# EAGLE board _main (EAGLE 8.0.2)
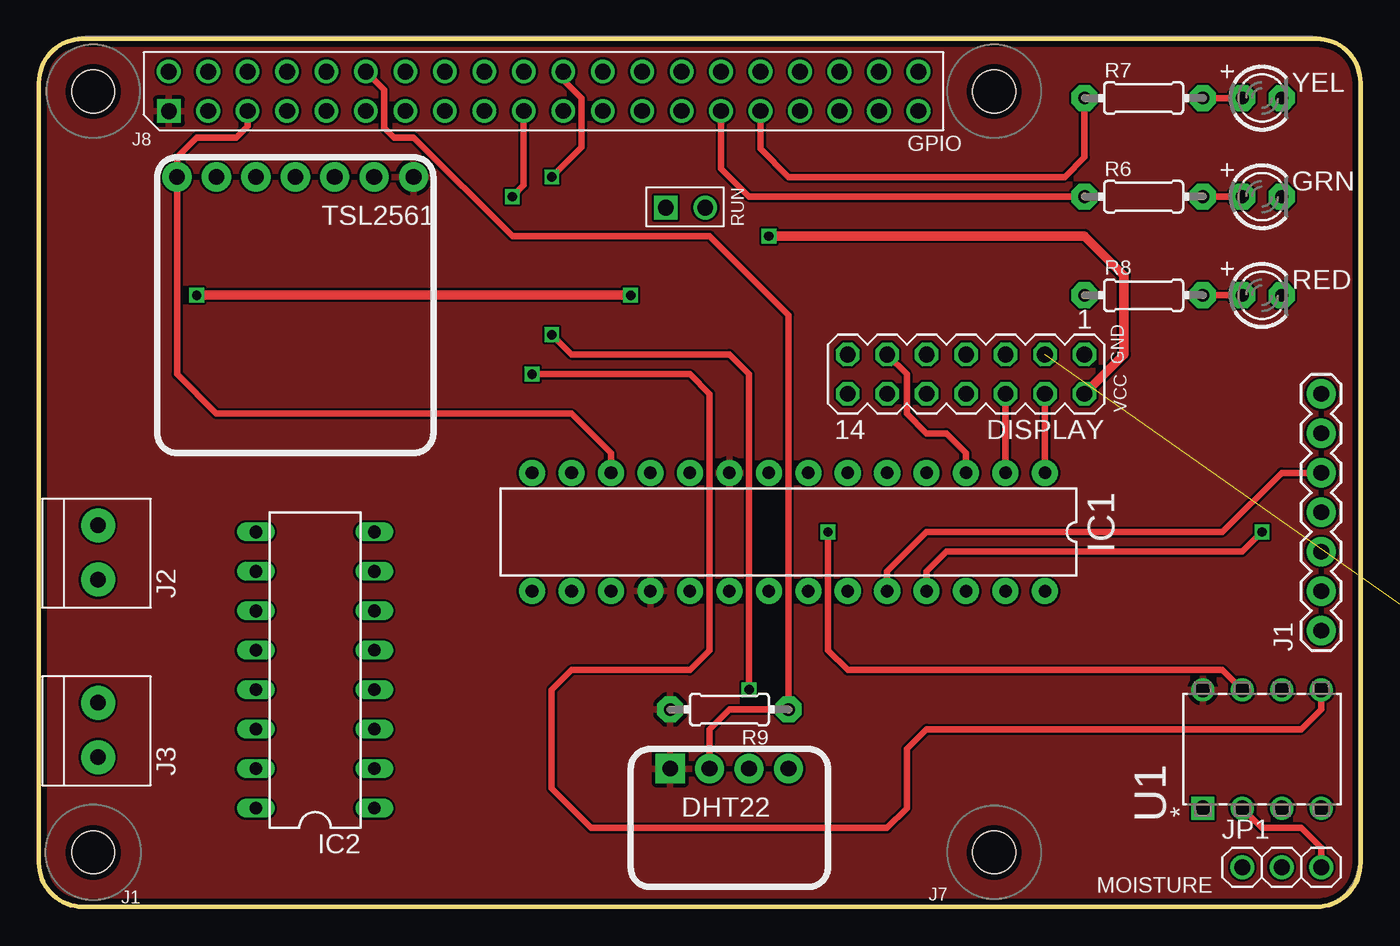
[diagram p0: board, top side]
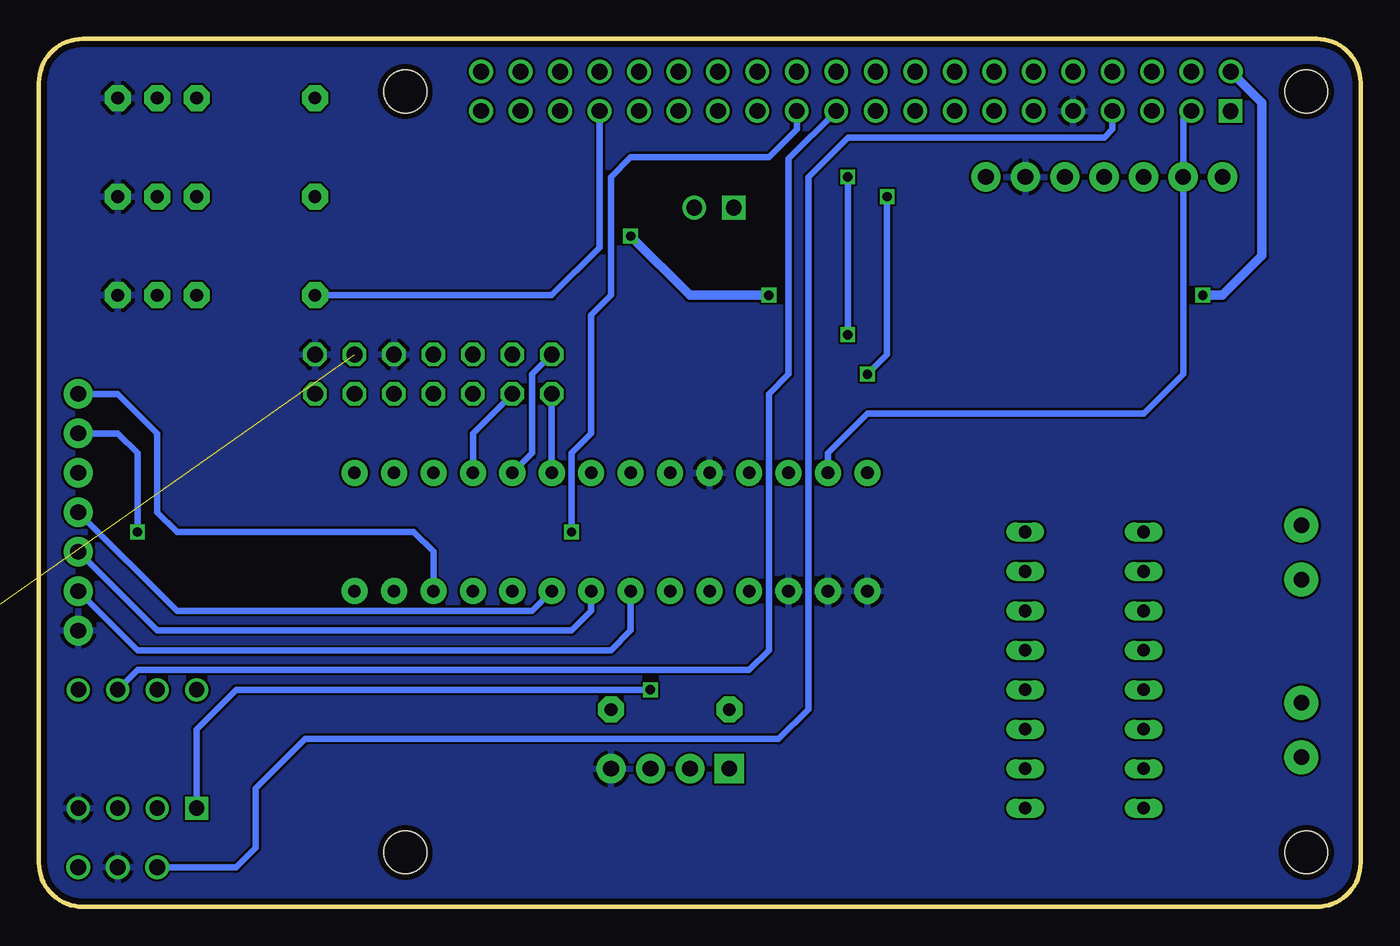
[diagram p1: board, bottom side, seen from below]

Size 85.09 x 55.88 mm. Coordinates in mm from the lower left corner, seen from the top.
Copper layers (1*16): Top 0.0356mm / dielectric 1.5011mm / Bottom 0.0356mm
Design rules "MakerWorks": minimum track width 6mil, minimum drill 13mil, track to track 6mil, track to pad 6mil, pad to pad 6mil, via to via 6mil, smd to smd 6mil, copper to edge 15mil, drill to drill 6mil, minimum pad ring 7mil, minimum via ring 7mil, stop-mask expansion 3mil, vias tented up to drill 0mil, thermal gap 10mil

## Footprints (pad centres in the part's own frame; a part is rotated, then mirrored left to right if it is on the bottom)
1X04_NO_SILK = drill 1.016 pad 1.88 square: 1 0,0 | drill 1.016 pad 1.88: 2 2.54,0; 3 5.08,0; 4 7.62,0
MA07-2 = drill 1.016 octagon: 1 -7.62,-1.27; 2 -7.62,1.27; 3 -5.08,-1.27; 4 -5.08,1.27; 5 -2.54,-1.27; 6 -2.54,1.27; 7 0,-1.27; 8 0,1.27; 9 2.54,-1.27; 10 2.54,1.27; 11 5.08,-1.27; 12 5.08,1.27; 13 7.62,-1.27; 14 7.62,1.27
LED3MM = drill 0.813 pad 1.676 octagon: A -1.27,0; K 1.27,0
DIL28-3-ROUND = drill 0.813 pad 1.676: 1 -16.51,-3.81; 2 -13.97,-3.81; 3 -11.43,-3.81; 4 -8.89,-3.81; 5 -6.35,-3.81; 6 -3.81,-3.81; 7 -1.27,-3.81; 8 1.27,-3.81; 9 3.81,-3.81; 10 6.35,-3.81; 11 8.89,-3.81; 12 11.43,-3.81; 13 13.97,-3.81; 14 16.51,-3.81; 15 16.51,3.81; 16 13.97,3.81; 17 11.43,3.81; 18 8.89,3.81; 19 6.35,3.81; 20 3.81,3.81; 21 1.27,3.81; 22 -1.27,3.81; 23 -3.81,3.81; 24 -6.35,3.81; 25 -8.89,3.81; 26 -11.43,3.81; 27 -13.97,3.81; 28 -16.51,3.81
DIL16 = drill 0.813 long: 1 -8.89,-3.81; 2 -6.35,-3.81; 3 -3.81,-3.81; 4 -1.27,-3.81; 5 1.27,-3.81; 6 3.81,-3.81; 7 6.35,-3.81; 8 8.89,-3.81; 9 8.89,3.81; 10 6.35,3.81; 11 3.81,3.81; 12 1.27,3.81; 13 -1.27,3.81; 14 -3.81,3.81; 15 -6.35,3.81; 16 -8.89,3.81
1X07 = drill 1.016 pad 1.88: 1 0,0; 2 2.54,0; 3 5.08,0; 4 7.62,0; 5 10.16,0; 6 12.7,0; 7 15.24,0
1X2-3.5MM = drill 1 pad 2.184: 1 1.8,0; 2 -1.7,0
1X03 = drill 1.016: 1 -2.54,0; 2 0,0; 3 2.54,0
RPI2 = drill 1.016 square: P$1 8.37,51.23; P$41 40.36,45.01 | drill 1.016: P$2 8.357,53.772; P$3 10.897,51.232; P$4 10.897,53.772; P$5 13.437,51.232; P$6 13.437,53.772; P$7 15.977,51.232; P$8 15.977,53.772; P$9 18.517,51.232; P$10 18.517,53.772; P$11 21.057,51.232; P$12 21.057,53.772; P$13 23.597,51.232; P$14 23.597,53.772; P$15 26.137,51.232; P$16 26.137,53.772; P$17 28.677,51.232; P$18 28.677,53.772; P$19 31.217,51.232; P$20 31.217,53.772; P$21 33.757,51.232; P$22 33.757,53.772; P$23 36.297,51.232; P$24 36.297,53.772; P$25 38.837,51.232; P$26 38.837,53.772; P$27 41.377,51.232; P$28 41.377,53.772; P$29 43.917,51.232; P$30 43.917,53.772; P$31 46.457,51.232; P$32 46.457,53.772; P$33 48.997,51.232; P$34 48.997,53.772; P$35 51.537,51.232; P$36 51.537,53.772; P$37 54.077,51.232; P$38 54.077,53.772; P$39 56.617,51.232; P$40 56.617,53.772; P$42 42.9,45.01 | hole 2.75: 3.5,3.5; 61.5,3.5; 3.5,52.5; 61.5,52.5
3RP/1610N = drill 1.2 pad 2.184: 1 -5,0; 2 0,0; 3 5,0
0204/7 = drill 0.813 pad 1.676 octagon: 1 -3.81,0; 2 3.81,0
1X07_NO_SILK = drill 1.016 pad 1.88: 1 0,0; 2 2.54,0; 3 5.08,0; 4 7.62,0; 5 10.16,0; 6 12.7,0; 7 15.24,0
DIP254P762X533-8 = drill 0.991 square: 1 -7.62,7.62 | drill 0.991: 2 -7.62,5.08; 3 -7.62,2.54; 4 -7.62,0; 5 0,0; 6 0,2.54; 7 0,5.08; 8 0,7.62

## Placement (x,y rotation side)
DHT22  [1X04_NO_SILK]  40.64,8.89 0 top
DISPLAY  [MA07-2]  59.69,34.29 180 top
GRN  [LED3MM]  78.74,45.72 0 top
IC1  MCP23017SP2  [DIL28-3-ROUND]  48.26,24.13 180 top
IC2  L293D  [DIL16]  17.78,15.24 90 top
J1  [1X07]  82.55,17.78 90 top
J2  1X2-3.5MM  [1X2-3.5MM]  3.81,22.86 270 top
J3  1X2-3.5MM  [1X2-3.5MM]  3.81,11.43 270 top
JP1  [1X03]  80.01,2.54 0 top
PCB1  RPI2  [RPI2]  0,0 0 top
R4  [3RP/1610N]  99.06,11.43 90 top  (outside the outline)
R5  1k  [0204/7]  90.17,7.62 270 top  (outside the outline)
R6  270  [0204/7]  71.12,45.72 0 top
R7  270  [0204/7]  71.12,52.07 0 top
R8  270  [0204/7]  71.12,39.37 0 top
R9  10k  [0204/7]  44.45,12.7 180 top
RED  [LED3MM]  78.74,39.37 0 top
TSL2561  [1X07_NO_SILK]  24.13,46.99 180 top
U1  MCP3002-I/P  [DIP254P762X533-8]  82.55,13.97 90 top
YEL  [LED3MM]  78.74,52.07 0 top

## Library data of the parts
DHT22 = SparkFun-Connectors; PROD_ID: CONN-09696
DISPLAY = con-lstb; OC_FARNELL: unknown; OC_NEWARK: unknown
GRN IC1 J2 J3 JP1 R5-R9 RED YEL = adafruit
IC2 = st-microelectronics; MPN: L293D; OC_FARNELL: 9589619; OC_NEWARK: 56P8249
J1 TSL2561 = SparkFun-Connectors
PCB1 = e14_Rpi2_RevA
R4 = pot
U1 = mcp; MPN: MCP3002-I/P; OC_FARNELL: 1852015; OC_NEWARK: 61K2948; PACKAGE: DIP-8; SUPPLIER: Microchip

## Nets
5V: DISPLAY.2 PCB1.P$2
+12V: J2.1
CE0: PCB1.P$22 U1.1
CE1: PCB1.P$24
DHTGPIO: DHT22.2 PCB1.P$12 R9.1
GND: DHT22.4 DISPLAY.1 DISPLAY.5 GRN.K IC1.10 IC1.15 IC1.16 IC1.17 J1.1 JP1.2 PCB1.P$9 R4.3 RED.K TSL2561.2 U1.4 YEL.K
GND1: IC2.4
GND2: IC2.5
GND3: IC2.13
GND4: IC2.12
GNDA: J2.2
GPIO4: JP1.1 PCB1.P$7
GPIO5: PCB1.P$29 R6.1
GPIO6: PCB1.P$31 R7.1
GPIO13: PCB1.P$33 R8.1
MISO: PCB1.P$21 U1.6
MOSI: PCB1.P$19 U1.5
N$1: IC1.26 J1.7
N$2: IC1.25 J1.6
N$3: IC1.24 J1.5
N$4: IC1.23 J1.4
N$5: IC1.22 J1.3
N$6: JP1.3 U1.2
N$7: IC1.21 J1.2
N$11: DISPLAY.4 IC1.1
N$12: R4.1 R5.1
N$13: DISPLAY.6 IC1.2
N$14: DISPLAY.11 IC1.3
N$15: DISPLAY.12 IC1.4
N$16: DISPLAY.13 IC1.5
N$17: DISPLAY.14 IC1.6
N$18: GRN.A R6.2
N$19: R7.2 YEL.A
N$20: R8.2 RED.A
OUT1: J3.1
OUT2: J3.2
POT: DISPLAY.3 R4.2
SCL: IC1.12 PCB1.P$5 TSL2561.7
SCLK: PCB1.P$23 U1.7
SDA: IC1.13 PCB1.P$3 TSL2561.6
VCC: DHT22.1 IC1.9 IC1.18 PCB1.P$1 R5.2 R9.2 TSL2561.1 U1.8
VCC1: IC2.16
VCC2: IC2.8

## Tracks (layer width: path | path; a pad name or v marks a point on that pad's centre or on a via)
5V  (via drill 0.6)
  Top 0.61: DISPLAY.2 69.85,35.56 69.85,40.64 67.31,43.18 v46.99,43.18 | v38.1,39.37 v10.16,39.37
  Bottom 0.61: v10.16,39.37 8.89,39.37 6.35,41.91 6.35,51.77 PCB1.P$2 | v46.99,43.18 43.18,39.37 v38.1,39.37
CE0  (via drill 0.6)
  Top 0.406: PCB1.P$22 33.76,53.24 34.92,52.07 34.92,48.89 v33.02,46.99 | v33.02,36.83 34.29,35.56 44.45,35.56 45.72,34.29 v45.72,13.97
  Bottom 0.406: v33.02,46.99 v33.02,36.83 | v45.72,13.97 72.39,13.97 74.93,11.43 U1.1
DHTGPIO
  Top 0.406: DHT22.2 43.18,11.43 44.45,12.7 R9.1 48.26,38.1 43.18,43.18 30.48,43.18 24.13,49.53 22.86,49.53 22.23,50.16 22.23,52.6 PCB1.P$12
GND
  pour Bottom: 0,55.88 85.09,55.88 85.09,0 0,0
GPIO4
  Bottom 0.406: PCB1.P$7 15.98,50.06 16.51,49.53 33.02,49.53 35.56,46.99 35.56,12.7 37.46,10.79 67.94,10.79 71.12,7.62 71.12,3.81 72.39,2.54 JP1.1
GPIO5
  Top 0.406: PCB1.P$29 43.92,47.52 45.72,45.72 R6.1
GPIO6
  Top 0.406: PCB1.P$31 46.46,48.79 48.26,46.99 66.04,46.99 67.31,48.26 R7.1
GPIO13
  Bottom 0.406: PCB1.P$33 49,42.44 52.07,39.37 R8.1
MISO
  Bottom 0.406: PCB1.P$21 36.83,48.16 36.83,34.29 38.1,33.02 38.1,16.51 39.37,15.24 78.74,15.24 U1.6
MOSI  (via drill 0.6)
  Top 0.406: PCB1.P$19 31.22,46.46 v30.48,45.72 | v31.75,34.29 41.91,34.29 43.18,33.02 43.18,16.51 41.91,15.24 34.29,15.24 33.02,13.97 33.02,7.62 35.56,5.08 54.61,5.08 55.88,6.35 55.88,10.16 57.15,11.43 81.28,11.43 82.55,12.7 U1.5
  Bottom 0.406: v30.48,45.72 30.48,35.56 v31.75,34.29
N$1
  Bottom 0.406: IC1.26 59.69,22.86 60.96,24.13 76.2,24.13 77.47,25.4 77.47,30.48 80.01,33.02 J1.7
N$2  (via drill 0.6)
  Top 0.406: IC1.25 57.15,21.59 58.42,22.86 77.47,22.86 v78.74,24.13
  Bottom 0.406: v78.74,24.13 78.74,29.21 80.01,30.48 J1.6
N$3
  Top 0.406: IC1.24 54.61,21.59 57.15,24.13 76.2,24.13 80.01,27.94 J1.5
N$4
  Bottom 0.406: IC1.23 53.34,19.05 76.2,19.05 J1.4
N$5
  Bottom 0.406: IC1.22 49.53,19.05 50.8,17.78 77.47,17.78 J1.3
N$6
  Top 0.406: JP1.3 82.55,3.81 81.28,5.08 78.74,5.08 U1.2
N$7
  Bottom 0.406: J1.2 78.74,16.51 48.26,16.51 46.99,17.78 IC1.21
N$11
  Top 0.406: DISPLAY.4 IC1.1
N$12  (1 unrouted)
N$13
  Top 0.406: DISPLAY.6 IC1.2
N$14
  Top 0.406: DISPLAY.11 55.88,34.29 55.88,31.75 57.15,30.48 58.42,30.48 59.69,29.21 IC1.3
N$15
  Bottom 0.406: DISPLAY.12 57.15,30.48 IC1.4
N$16
  Bottom 0.406: DISPLAY.13 53.34,34.29 53.34,29.21 IC1.5
N$17
  Bottom 0.406: DISPLAY.14 IC1.6
N$18
  Top 0.406: R6.2 GRN.A
N$19
  Top 0.406: R7.2 YEL.A
N$20
  Top 0.406: R8.2 RED.A
POT  (1 unrouted)
SCL
  Top 0.406: PCB1.P$5 13.44,50.27 12.7,49.53 10.16,49.53 8.89,48.26 TSL2561.7 8.89,34.29 11.43,31.75 34.29,31.75 36.83,29.21 IC1.12
SCLK  (via drill 0.6)
  Top 0.406: v50.8,24.13 50.8,16.51 52.07,15.24 76.2,15.24 U1.7
  Bottom 0.406: PCB1.P$23 36.3,50.06 38.1,48.26 46.99,48.26 48.26,46.99 48.26,39.37 49.53,38.1 49.53,30.48 50.8,29.21 v50.8,24.13
SDA
  Bottom 0.406: PCB1.P$3 11.43,50.7 TSL2561.6 11.43,34.29 13.97,31.75 31.75,31.75 34.29,29.21 IC1.13
VCC
  pour Top: 0,0 0,55.88 85.09,55.88 85.09,0

## Text on the board
tPlace: GND | VCC | VCC | GND | MOISTURE